# Altium PCB PCB1.PcbDoc
Units mil, origin at the board's own origin, x right, y up, seen from the top; angles counter-clockwise.
Board outline 2165 x 1515 mil, 2 copper layers (Top Layer, Bottom Layer), stack 61.855 mil thick; 17 components, 12 nets, 42 pads, 6 vias.
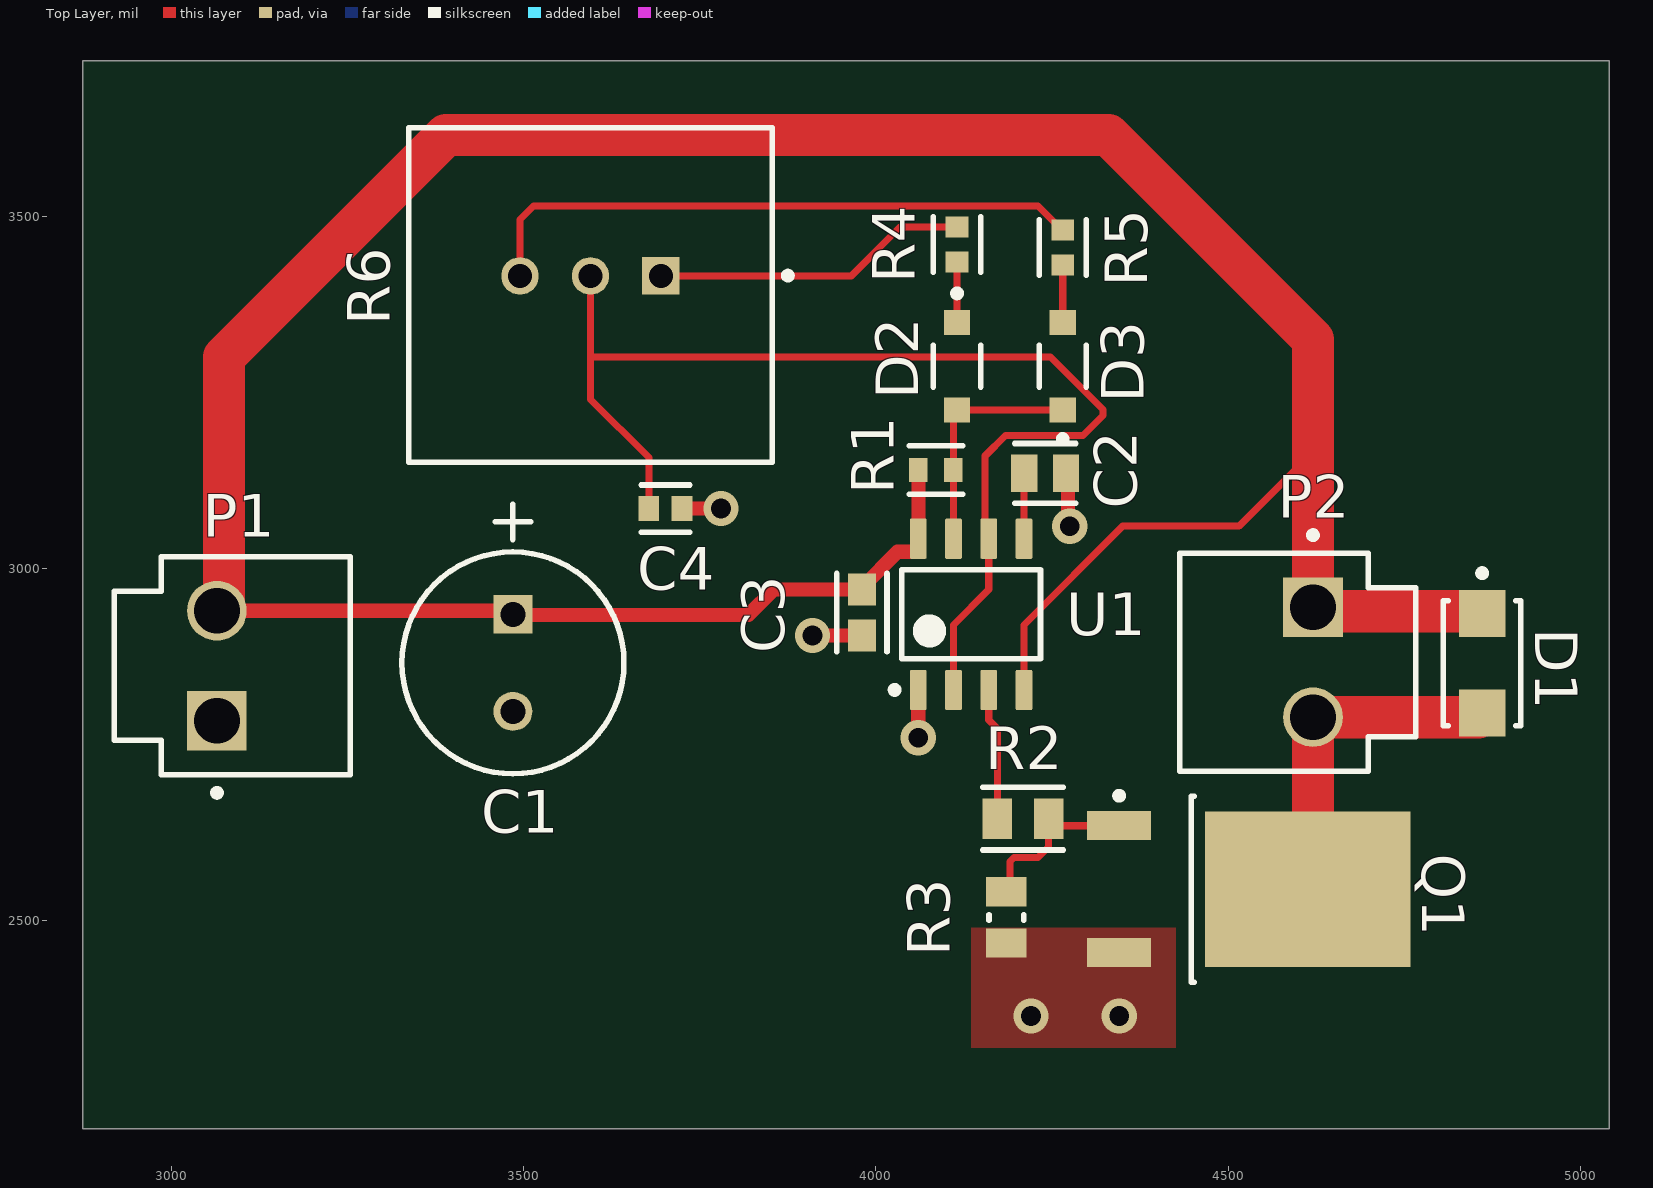
[diagram p0: Top Layer view]
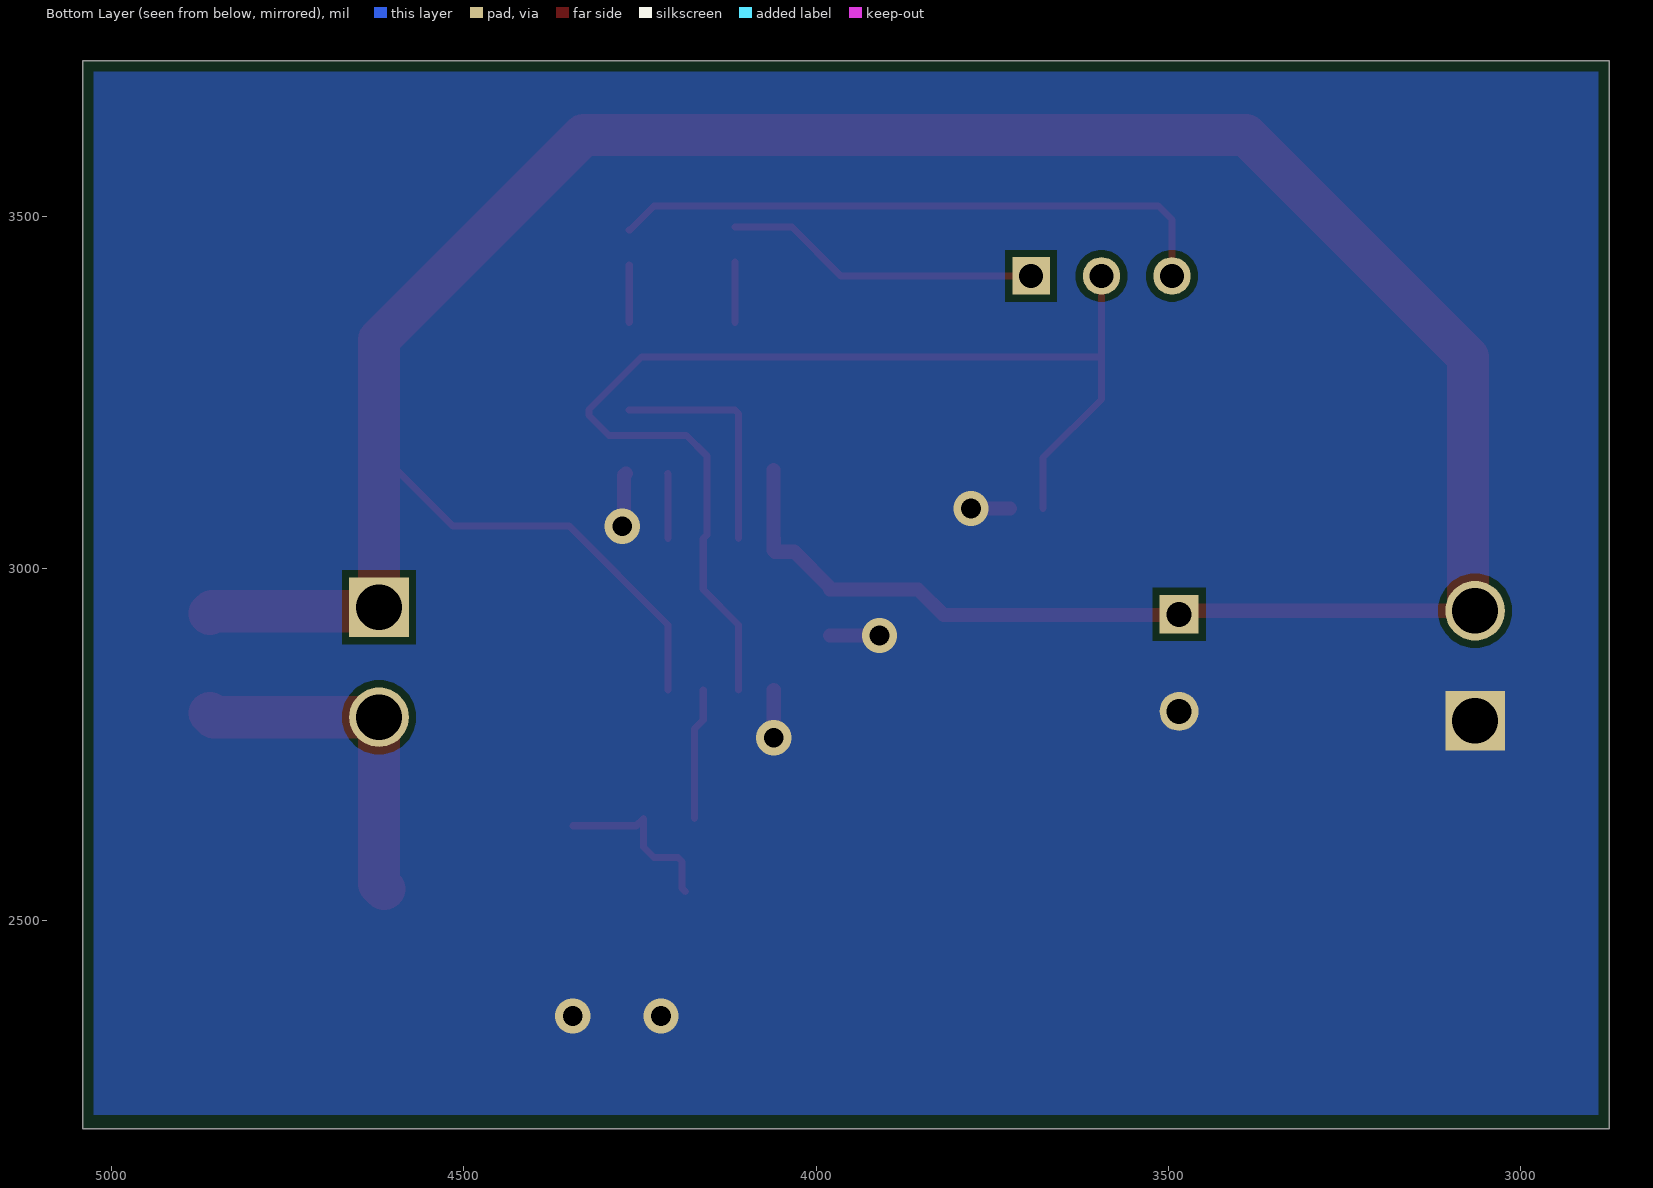
[diagram p1: Bottom Layer view, seen from below]
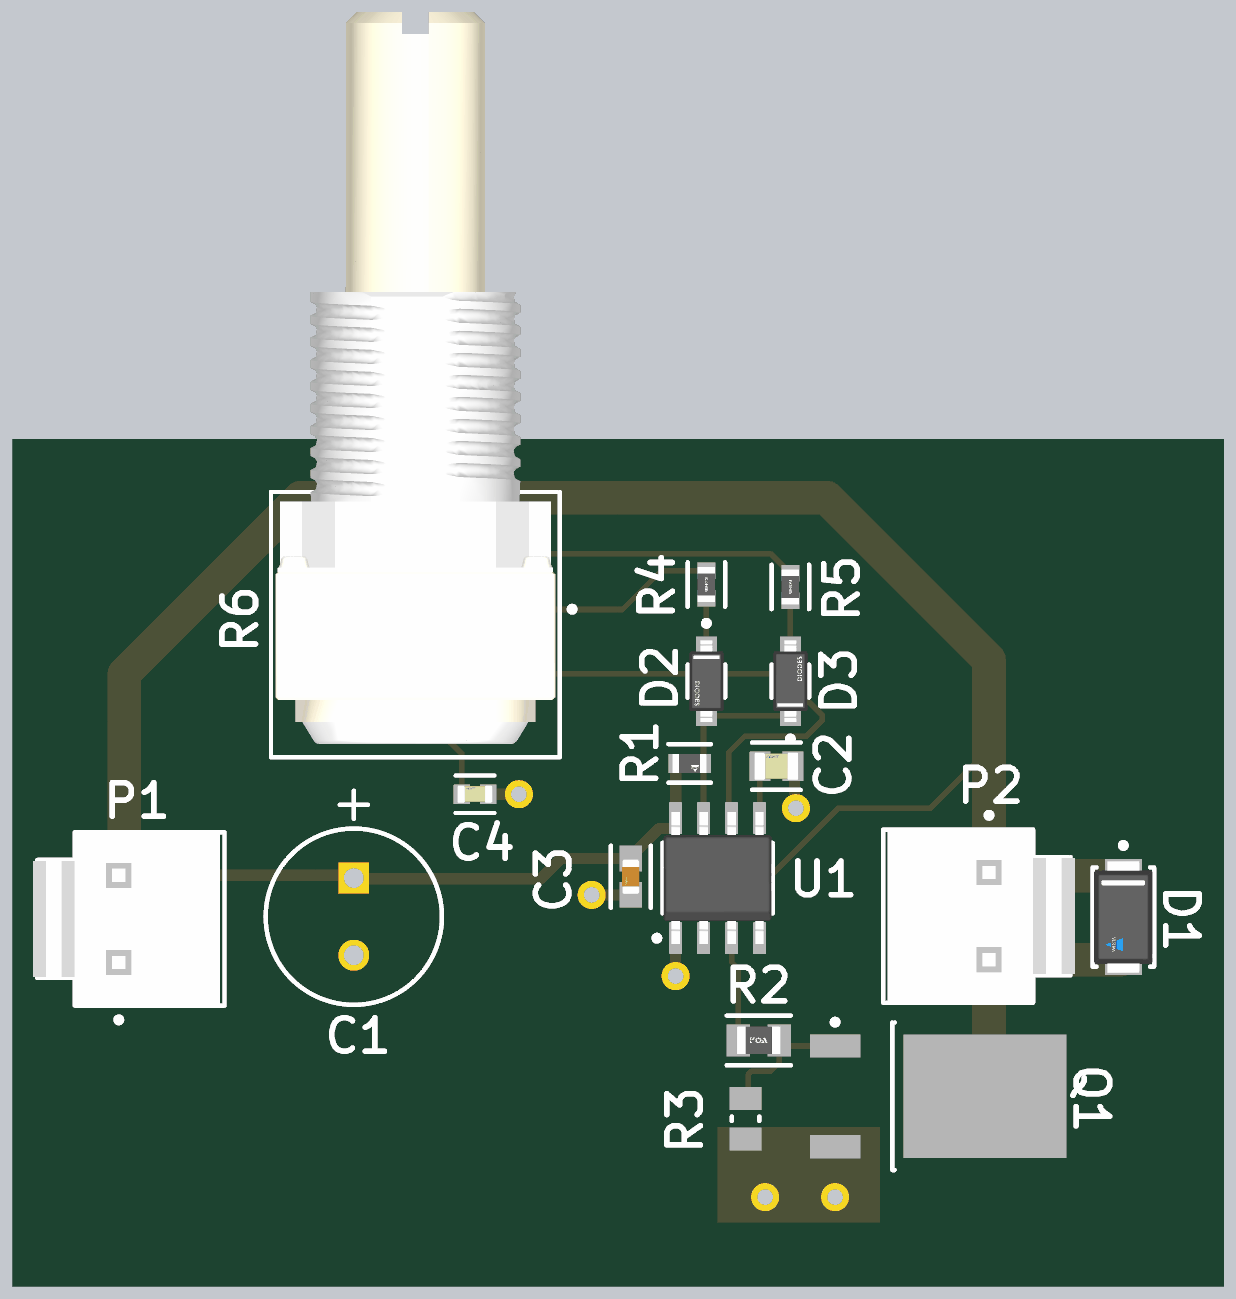
[diagram p2: 3D render of the assembled board from above, using the file's embedded part models]

## Layer stack, top to bottom
Top Solder: solder mask 0.4, Solder Resist, Dk 3.5
Top Layer: signal copper 1.4
Dielectric 1: dielectric 59.0551, FR-4, Dk 4.8
Bottom Layer: signal copper 1.4
Bottom Solder: solder mask 0.4, Solder Resist, Dk 3.5

## Board outline
2875,2205 5040,2205 5040,3720 2875,3720

## Design rules (kind name [scope] priority, off if disabled: settings)
Clearance [All] p1: gap=10 ignorepadtopadclearanceinfootprint=FALSE
PolygonConnect [All] p1: connectstyle=Direct reliefconductorwidth=10 reliefentries=4 polygonreliefangle="90 Angle" airgapwidth=10
RoutingVias [All] p1: holewidth=28 width=50 viastyle="Through Hole" minholewidth=28 minwidth=50 maxholewidth=28 maxwidth=50
SilkToSilkClearance [All] p1: silktosilkclearance=6
SilkToSolderMaskClearance [IsPad] p1: minsilkscreentomaskgap=6 clearancetoexposedcopper=TRUE
SolderMaskExpansion [All] p1: expansion=0 istentingtop=FALSE
SupplyNets "Schematic Supply Nets_1" [InNet('GND')] p1: voltage=0.000
SupplyNets "Schematic Supply Nets" [InNet('VCC')] p2: voltage=0.000
Width [All] p1: maxlimit=100 minlimit=10 preferedwidth=10
28 further rules are at their usual default settings.

## Components (designator, comment, footprint, x,y, rotation, side; value= is the part's Value field where it differs from the comment)
C1 "ECA1HM101" CAPPR65-350-1150X800X1250 3485,2866.1 r270 top value=100µF
C2 "C0805C103J3HACTU" FP-C0805C-DN-MFG 4240,3135 r0 top value="10,000 pF"
C3 "GCH188R71E104KE01J" FP-GCH188-0_1-e0_2_0_5-IPC_A 3980,2937.55 r270 top
C4 "C0603C102F3GAC" FP-C0603C-CF-MFG 3701.38,3085 r0 top value="1,000 pF"
D1 "SSA34HE3_A/I" FP-95400-MFG 4860,2865.47 r270 top
D2 "1N4148W-13-F" FP-SOD123-MFG 4115,3287.01 r270 top value=2pF
D3 "1N4148W-13-F" FP-SOD123-MFG 4265,3287.01 r90 top value=2pF
P1 "B2P-VH(LF)(SN)" JST-B2P-VH(LF)(SN)_V 3120.12,2862.05 r90 top
P2 "B2P-VH(LF)(SN)" JST-B2P-VH(LF)(SN)_V 4564.88,2867.05 r270 top
Q1 "IPD053N06N" INF-PG-TO252-3-11_A_M 4530.04,2545.16 r0 top
R1 "MCT0603PD1001DP500" FP-MCT0603-IPC_C 4085,3140 r0 top
R2 "RN73R2ATTD47R0C25" FP-RN73R2A-IPC_B 4208.56,2645 r0 top
R3 "SG73P2ATTD1003F" RESC2013X60X30NL20T20 4185,2505 r90 top
R4 "MCR03EZPFX2201" FP-MCR03-IPC_C 4115,3459.68 r270 top
R5 "MCR03EZPFX2201" FP-MCR03-IPC_C 4265,3455.32 r270 top
R6 "249FGJSPXB25503KA" FP-249FGJSPXB25503KA-MFG 3595,3835.5 r270 top
U1 "NE555DR" D0008A_N 4135,2935 r90 top

## Footprints (in the part's own frame and the unit in brackets; to place one, negate y for a bottom-side part, rotate by r counter-clockwise, add the part's x,y. Pads: shape width x height; smd on the part's side, far side on the other; paste and mask are expansions set on the pad)
CAPPR65-350-1150X800X1250 [mm] "THD, 2-Leads, Dia 8mm, Pin Spacing 3.5mm"
  rect 1.4x1.4 hole 0.9: 1(-1.75,0)
  round 1.4 hole 0.9: 2(1.75,0)
  silkscreen extent -5.71,-4 4,4, body extent -4,-4 3.95,4, height 12.5
D0008A_N [mm] "SOIC, 8-Leads, Body 5x4mm, Pitch 1.27mm, IPC Medium Density"
  rrect17% 1.45x0.6 smd: 1(-2.725,1.905) 2(-2.725,0.635) 3(-2.725,-0.635) 4(-2.725,-1.905) 5(2.725,-1.905) 6(2.725,-0.635) 7(2.725,0.635) 8(2.725,1.905)
  silkscreen extent -2.85,-2.5 1.6,2.88, body extent -3,-2.45 3,2.45, height 1.63
FP-249FGJSPXB25503KA-MFG [mm]
  rect 1.35x1.35 hole 0.85 paste-2539.97 mask+0: 1(10.681,2.54)
  round 1.35 hole 0.85 paste-2539.97 mask+0: 2(10.681,0) 3(10.681,-2.54)
  silkscreen extent 5.35,-6.55 17.39,7.24, body extent -17.49,-6.65 17.49,6.65, height 0.25
FP-95400-MFG [mm]
  rect 1.7x1.68 smd paste+0 mask+0: 1(-1.79,0) 2(1.79,0)
  silkscreen extent -3.37,-1.4 2.25,1.4, body extent -2.74,-1.5 2.74,1.5, height 0.25
FP-C0603C-CF-MFG [mm]
  rect 0.75x0.9 smd paste+0 mask+0: 1(-0.6,0) 2(0.6,0)
  silkscreen extent -0.87,-0.85 0.88,0.85, body extent -1.2,-0.6 1.2,0.6, height 0.25
FP-C0805C-DN-MFG [mm]
  rect 0.95x1.35 smd paste+0 mask+0: 1(-0.75,0) 2(0.75,0)
  silkscreen extent -1.1,-1.07 1.1,1.07, body extent -1.4,-0.85 1.4,0.85, height 0.25
FP-GCH188-0_1-e0_2_0_5-IPC_A [mil]
  rect 45.62x39.85 smd paste+0 mask+0: 1(-32.55,0) 2(32.55,0)
  silkscreen extent -55,-36 55,36, body extent -75,-40 75,40, height 10
FP-MCR03-IPC_C [mil]
  rect 29.85x31.97 smd paste+0 mask+0: 1(-24.68,0) 2(24.68,0)
  silkscreen extent -40,-33 40,33, body extent -44,-22 44,22, height 10
FP-MCT0603-IPC_C [mil]
  rect 26.13x33.94 smd paste+0 mask+0: 1(-24.78,0) 2(24.78,0)
  silkscreen extent -38,-34 38,34, body extent -42,-23 42,23, height 10
FP-RN73R2A-IPC_B [mil]
  rect 41.54x57.33 smd paste+0 mask+0: 1(-36.44,0) 2(36.44,0)
  silkscreen extent -57,-44 57,44, body extent -67,-39 67,39, height 10
FP-SOD123-MFG [mm]
  rect 0.9x0.95 smd paste+0 mask+0: 1(-1.575,0) 2(1.575,0)
  silkscreen extent -2.75,-0.85 0.75,0.85, body extent -2.12,-0.95 2.12,0.95, height 0.25
INF-PG-TO252-3-11_A_M [mm] "DPAK, 3-Leads, Body 6.57x6.1mm, Pitch 2.29mm, IPC Low Density"
  rect 2.3x1.05 smd: 1(-4.7,2.29) 3(-4.7,-2.29)
  rect 7.4x5.6 smd: 2(2.1,0)
  silkscreen extent -4.82,-3.35 -2,3.49, body extent -2.1,-3.37 4.12,3.37, height 2.41
JST-B2P-VH(LF)(SN)_V [mm] "THD, 2-Leads, Body 8.5x7.86mm, Pitch 3.96mm"
  rect 2.15x2.15 hole 1.65: 1(-1.98,1.4)
  round 2.15 hole 1.65: 2(1.98,1.4)
  silkscreen extent -4.7,-3.4 3.93,5.1, body extent -3.93,-3.2 3.93,5.3, height 10.9
RESC2013X60X30NL20T20 [mm] "Chip Resistor, 2-Leads, Body 2.00x1.25mm, IPC Medium Density"
  rect 1.05x1.45 smd: 1(-0.925,0) 2(0.925,0)
  silkscreen extent -0.1,-0.63 0.1,0.63, body extent -1.1,-0.72 1.1,0.72, height 0.6

## Part data
C1: library part CMP-001-00026-7, "Aluminum Electrolytic Capacitor, 100 uF, +/- 20%, 50 V, -40 to 85 degC, 2-Pin THD, RoHS, Bulk", Capacitor Type=Electrolytic, Case/Package=Radial, Manufacturer=Panasonic, Max Operating Temperature=85°C, Min Operating Temperature=-40°C, Package Description="2-Pin Radial Lead, Dia 8 mm, Height 12.5 mm", Package Quantity=200, Package Reference=CAPPR65-350-1150X800X1250, Ripple Current=250mA, Tolerance=20%, Voltage Rating=50V, Datasheet URL=https://industrial.panasonic.com/cdbs/www-data/pdf/RDF0000/ABA0000C1218.pdf, Datasheet Version="Rev. 05, 10/2016", Diameter=8mm, Lead Pitch=3.5mm, Manufacturer URL=http://www.panasonic.com/, Mounting Technology=TH, Packaging=Bulk, Pins=2, Ripple Current (AC)=250mA, RoHS Compliant=True
C2: library part CMP-03020-006789-1, "CAP CER 10000PF 25V X8R 0805", Capacitance="10,000 pF", Manufacturer=KEMET, Package=C0805C-DN, Temperature="-55°C to +125°C", Temperature Characteristic=X8R, Temperature Coefficient=30ppm/°C, Temperature Range High=+125°C, Temperature Range Low=-55°C, Tolerance=0.05, Voltage Rating="25 V", Automotive=No, Category=Cap, ComponentLink2Description=Datasheet, ComponentLink2URL=https://content.kemet.com/datasheets/KEM_C1003_C0G_SMD.pdf, Device Class L1="Passive Components", Device Class L2=Capacitors, Device Class L3="Ceramic Capacitors", Digikey Description="CAP CER 10000PF 25V X8R 0805", Height=0.88mm, Ipc Land Pattern Name=CAPC200125X78, Lead Free=Yes, Manufacturer Part Number=C0805C103J3HACTU, Material=Ceramic, Mouser Description="Multilayer Ceramic Capacitors MLCC - SMD/SMT 25V 10000pF +/-5% X8R", Octopart=https://octopart.com/c0805c103j3hactu-kemet-19034692, RoHS=TRUE
C3: library part CMP-06035-036210-1, "Ceramic Capacitor 100nF ±10% 25V X7R 0603"
C4: library part CMP-03020-002782-2, "C0603 1,000 pF C0G 30ppm/°C 1.00% 25 V", Capacitance="1,000 pF", Manufacturer=KEMET, Package=C0603C-CF, Temperature="-55°C to +125°C", Temperature Characteristic=C0G, Temperature Coefficient=30ppm/°C, Temperature Range High=+125°C, Temperature Range Low=-55°C, Tolerance=0.01, Voltage Rating="25 V", Automotive=Yes, Automotive Grade="Grade 1", Category=Cap, ComponentLink2Description=Datasheet, ComponentLink2URL=https://api.kemet.com/component-edge/download/datasheet/C0603C100J5GACAUTO.pdf, Device Class L1="Passive Components", Device Class L2=Capacitors, Device Class L3="Ceramic Capacitors", Height=0.87mm, Lead Free=Yes, Manufacturer Part Number=C0603C102F3GAC, Material=Ceramic, Mouser Description="Multilayer Ceramic Capacitors MLCC - SMD/SMT 25volts 1000pF 1% C0G", Octopart=https://octopart.com/c0603c102f3gac-kemet-9143535, RoHS=TRUE
D1: library part CMP-02539-000063-1, "DIODE SCHOTTKY 40V 3A DO214AC", Average Rectified Current=3A, Case/Package=DO-214AC, Forward Voltage=380mV, Max Forward Surge Current (Ifsm)=75A, Max Operating Temperature=150°C, Max Repetitive Reverse Voltage (Vrrm)=40V, Max Reverse Current=17mA, Min Operating Temperature=-65°C, Package Quantity=7500, Element Configuration=Single, Forward Current=3A, Max Reverse Voltage (DC)=40V, Mount="Surface Mount", Packaging="Tape and Reel", Peak Non-Repetitive Surge Current=75A, Radiation Hardening=No, Reverse Voltage (DC)=40V, RoHS Compliant=Yes, Series="Automotive, AEC-Q101"
D2 D3: library part CMP-12791-000005-1, "DIODE GEN PURP 100V 150MA SOD123", Capacitance=2pF, Forward Current=300mA, Manufacturer="Diodes Inc.", Max Junction Temp=+150°C, Max Repetitive Reverse Voltage=100V, Max Surge Forward Current=1A, Package=SOD123, Peak Reverse Current=1uA, Temperature="-65°C to +150°C", Temperature Range Low=-65°C, Automotive=No, Category=Diode, ComponentLink2Description=Datasheet, ComponentLink2URL=https://upverter.com/datasheet/628e7d6fee5901eee6eef4567d1c3569f2cd3cde.pdf, Device Class L1="Discrete Semiconductors", Device Class L2=Diodes, Device Class L3="Rectifier Diodes", Digikey Description="DIODE GEN PURP 100V 150MA SOD123", Footprint Url=https://www.diodes.com/assets/Package-Files/SOD123.pdf, Height=1.45mm, Lead Free=Yes, Manufacturer Part Number=1N4148W-13-F, Mouser Description="1N4148W Series 2 A 100 V 400 mW Surface Mount Fast Switching Diode - SOD-123", Octopart=https://octopart.com/1n4148w-13-f-diodes+inc.-2359612, Reverse Voltage=100V, RoHS=TRUE, Standoff Height=0mm, Temperature Range High=+150°C
P1 P2: library part CMP-002-00025-2, "Male Header, Pitch 3.96 mm, 1 x 2 Position, Height 10.9 mm, Tail Length 3.7 mm, -25 to 85 degC, RoHS, Bulk", Manufacturer=JST, Max Operating Temperature=85°C, Min Operating Temperature=-25°C, Package Description="Male Header, Pitch 3.96 mm, 1 x 2 Position, Height 10.9 mm, Tail Length 3.7 mm", Case/Package=B2P-VH(LF)(SN), Connector Type=Header, Datasheet URL=http://www.jst-mfg.com/product/pdf/eng/eVH.pdf, Datasheet Version=May-16, Gender=Male, Manufacturer URL=http://www.jst.com/home2.html, Mounting Technology=TH, Package Reference=B2P-VH(LF)(SN), RoHS Compliant=Unknown
Q1: library part CMP-1091-00166-1, "N-Channel OptiMOS Power-Transistor, 60 V VDS, 45 A ID, -55 to 175 degC, PG-TO252-3-11, Reel, Green", Manufacturer=Infineon, ComponentLink1Description="Manufacturer URL", ComponentLink1URL=http://www.infineon.com/, ComponentLink2Description=Datasheet, ComponentLink2URL=http://www.infineon.com/dgdl/IPD053N06N_Rev2.2.pdf?folderId=db3a304313b8b5a60113cee8763b02d7&fileId=db3a30433727a44301372c22c4c3499f, ComponentLink3Description="Package Specification", ComponentLink3URL=http://www.infineon.com/dgdl/IPD160N04L_rev1.0.pdf?folderId=db3a3043163797a6011643468e7505a4&fileId=db3a3043163797a60116436401cf05cf, DatasheetVersion="Rev. 2.2", Green=TRUE, Halogen-free=TRUE, ID (max)="45Â A", IDpuls (max)="180Â A", Mounting Technology="Surface Mount", PackageDescription="3-Pin Plastic (Green) Transistor Single Outline Package, 6.57 x 6.1 mm Body, 2.29 mm Pitch", PackageReference=PG-TO252-3-11, PackageVersion="Rev. 02, 03/2007", Packing=Reel, PartNumber=IPD053N06N, Polarity=N, Ptot (max)="83Â W", QG="27Â nC", RDS (on) (max)="5.3Â mOhm", Rth="1.8Â K/W", RthJA (max)="62 K/W", RthJC (max)="1.8Â K/W", VDS (max)="60Â V", VGS(th) (max)="3.3 V", VGS(th) (min)="2.1Â V"
R1: library part CMP-02407-000265-1, "RES SMD 100 OHM 1% 1/8W 0603", Case Code (Imperial)=0603, Case Code (Metric)=1608, Max Operating Temperature=175°C, Max Power Dissipation=250mW, Min Operating Temperature=-55°C, Resistance=1kR, Temperature Coefficient=25ppm/°C, Tolerance=0.5%, Case/Package=0603, Composition="Thin Film", Features="Automotive AEC-Q200", Number of Terminations=2, Packaging="Tape and Reel"
R2: library part CMP-04015-007169-1, "47Ω ±0.25% 0.125W, 1/8W Chip Resistor 0805 (2012 Metric) Moisture Resistant Thin Film"
R3: library part CMP-2001-02617-1, Manufacturer="KOA Speer", Part Number=SG73P2ATTD1003F
R4 R5: library part CMP-08839-022897-1, "Thick Film Chip Resistor, 0603, 2.2kΩ, 1%, 100ppm/°C, 0.1W, 50V", Case Code (Imperial)=0603, Case Code (Metric)=1608, Max Operating Temperature=155°C, Max Power Dissipation=100mW, Min Operating Temperature=-55°C, Package Quantity=5000, Resistance=2.2kR, Resistor Type="Thick Film", Temperature Coefficient=100ppm/°C, Tolerance=1%, Voltage Rating (DC)=50V, Case/Package=0603, Contact Plating=Tin, Features="Automotive AEC-Q200", Height=0.022inch, Lead Free="Lead Free", Length=0.063inch, Mount="Surface Mount", Number of Terminations=2, Packaging="Tape and Reel", Power Rating=100mW, RoHS Compliant=Yes, Series=MCR03, Size Code=0603, Width=0.031inch
R6: library part CMP-00030-42669055-1, "249FGJSPXB25503KA Res Cermet POT 50K Ohm 20% 1W 1(Elec)/1(Mech)Turn 6.35mm Pin Panel Mount/Through Hole Bulk", Insulation Resistance=1GΩ, Max Operating Temperature=125°C, Min Operating Temperature=-55°C, Power Rating=1W, Resistance=50kΩ, Temperature Coefficient=100ppm/°C, Tolerance=10%, Voltage Rating=224V, Composition="Cermet, Potentiometer", Contact Plating=Tin, Depth=12.7mm, Height=13.11mm, Hole Diameter=9.525mm, Length=12.7mm, Military Standard=Not, Mount="Panel, Through Hole", NexarPartId=42669055, Number of Gangs=1, Number of Turns=1, REACH SVHC=Unknown, RoHS=Compliant, Termination=Pin, Type=Potentiometer, Width=12.7mm
U1: library part CMP-016-00007-3, "Precision Timer, 4.5 to 16 V, 0 to 70 degC, 8-Pin SOIC (D), Green (RoHS & no Sb/Br), Tape and Reel", Case/Package=SOIC, Frequency=100kHz, Manufacturer="Texas Instruments", Max Operating Temperature=70°C, Max Ouput Current=-200mA, Max Supply Voltage=16V, Min Operating Temperature=0°C, Min Supply Voltage=4.5V, Package Description="8-Pin Small Outline Integrated Circuit, Body 4.9 x 3.9 mm, Pitch 1.27 mm", Package Quantity=2500, Package Reference=D0008A, Package Version="4040047-3/M, 06/2011", Datasheet URL=http://www.ti.com/general/docs/lit/getliterature.tsp?genericPartNumber=NE555&fileType=pdf, Datasheet Version="SLFS022I, 09/2014", Manufacturer URL=http://www.ti.com/, Mounting Technology=SM, Package URL=http://www.ti.com/lit/ml/msoi002j/msoi002j.pdf, Packaging=TapeandReel, Pins=8, RoHS Compliant=True

## Via types
v1: diameter 50, hole 28, Top Layer to Bottom Layer, 6 vias

## Nets (pads, with @x,y where several pads share a name; then routed paths per layer and width w, separated by ;. In a path a pad name is that pad's centre, name@x,y a point inside that pad or via, vN(x,y) a via of type N, cw(c..) or ccw(c..) an arc to the next point about the centre after c; other vN are vias at no path point)
GND: C1.2 C2.2 C3.2 C4.2 P1.1 Q1.3 R3.1 U1.1 | length 270
  Top Layer w20: C4.2 v1(3780,3085) ; v1(3910,2905) C3.2 ; v1(4060,2760) U1.1 ; C2.2 4272.26,3132.26 4272.26,3062.74 v1(4275,3060)
  other v1: 4220,2365 4345,2365
LOAD_SW: D1.2 P2.2 Q1.2 | length 489.6
  Top Layer w60: Q1.2 4620,2552.44 P2.2 4854.49,2789.09 4860,2794.61 D1.2
NetC2_1: C2.1 U1.5 | length 92.9
  Top Layer w10: U1.5 4210,3134.53 C2.1
NetC4_1: C4.1 R6.2 U1.2 U1.6 | length 1676.5
  Top Layer w10: R6.2 3595,3300 ; C4.1 3677.76,3157.24 3595,3240 3595,3300 ; U1.2 4110,2920 4160,2970 U1.6 4155,3047.28 4155,3160 4183.59,3188.59 4293.59,3188.59 4322.17,3217.17 4322.17,3225.46 4247.63,3300 3595,3300
NetD2_1: D2.1 R4.2 | length 86
  Top Layer w10: D2.1 R4.2
NetD2_2: D2.2 D3.1 R1.2 U1.7 | length 335
  Top Layer w10: U1.7 4109.89,3042.39 4109.89,3139.89 R1.2 4109.78,3219.78 D2.2 D3.1
NetD3_2: D3.2 R5.2 | length 81.6
  Top Layer w10: D3.2 R5.2
NetQ1_1: Q1.1 R2.2 R3.2 | length 252.7
  Top Layer w10: R3.2 4190,2546.42 4190,2584.14 4195.86,2590 4230,2590 4245,2605 R2.2 4255,2635 4344.69,2635 Q1.1
NetR4_1: R4.1 R6.1 | length 448.7
  Top Layer w10: R6.1 3965,3415 4034.37,3484.37 R4.1
NetR5_1: R5.1 R6.3 | length 872.2
  Top Layer w10: R6.3 3495,3495 3514.29,3514.29 4229.64,3514.29 4263.94,3480 R5.1
PWM_OUT: R2.1 U1.3 | length 187.7
  Top Layer w10: U1.3 4160,2785 4172.13,2772.87 R2.1
VCC: C1.1 C3.1 D1.1 P1.2 P2.1 R1.1 U1.4 U1.8 | length 4522.1
  Top Layer w10: U1.4 4210,2920 4350,3060 4515,3060 4620,3165
  Top Layer w20: P1.2@3075,2945 3080,2940 3480,2940 C1.1 3486.1,2933.9 3818.9,2933.9 3855.09,2970.09 C3.1 3980,2972.98 4030.76,3023.74 4058.19,3023.74 4060,3025.55 U1.8 4060.11,3042.39 4060.11,3139.89 R1.1
  Top Layer w60: P1.2@3075,2945 3075,3300 3390,3615 4330,3615 4620,3325 4620,3165 P2.1 4625.59,2939.41 4856.93,2939.41 4860,2936.34 D1.1

## Polygon pours and split planes (outlines as drawn)
GND on Bottom Layer "GND_L02_P001" (solid, pour order 1): 2890,3705 2890,2225 5025,2225 5025,3705
GND on Top Layer "GND_L01_P000" (solid, pour order 0): 4425,2490 4425,2320 4135,2320 4135,2490